# Altium PCB mada7.PcbDoc (part 3 of 3)
Units mil, origin at the board's own origin, x right, y up, seen from the top; angles counter-clockwise.
Board outline 3925 x 3925 mil, 2 copper layers (TopLayer, BottomLayer); 71 components, 72 nets, 888 pads, 9 vias.
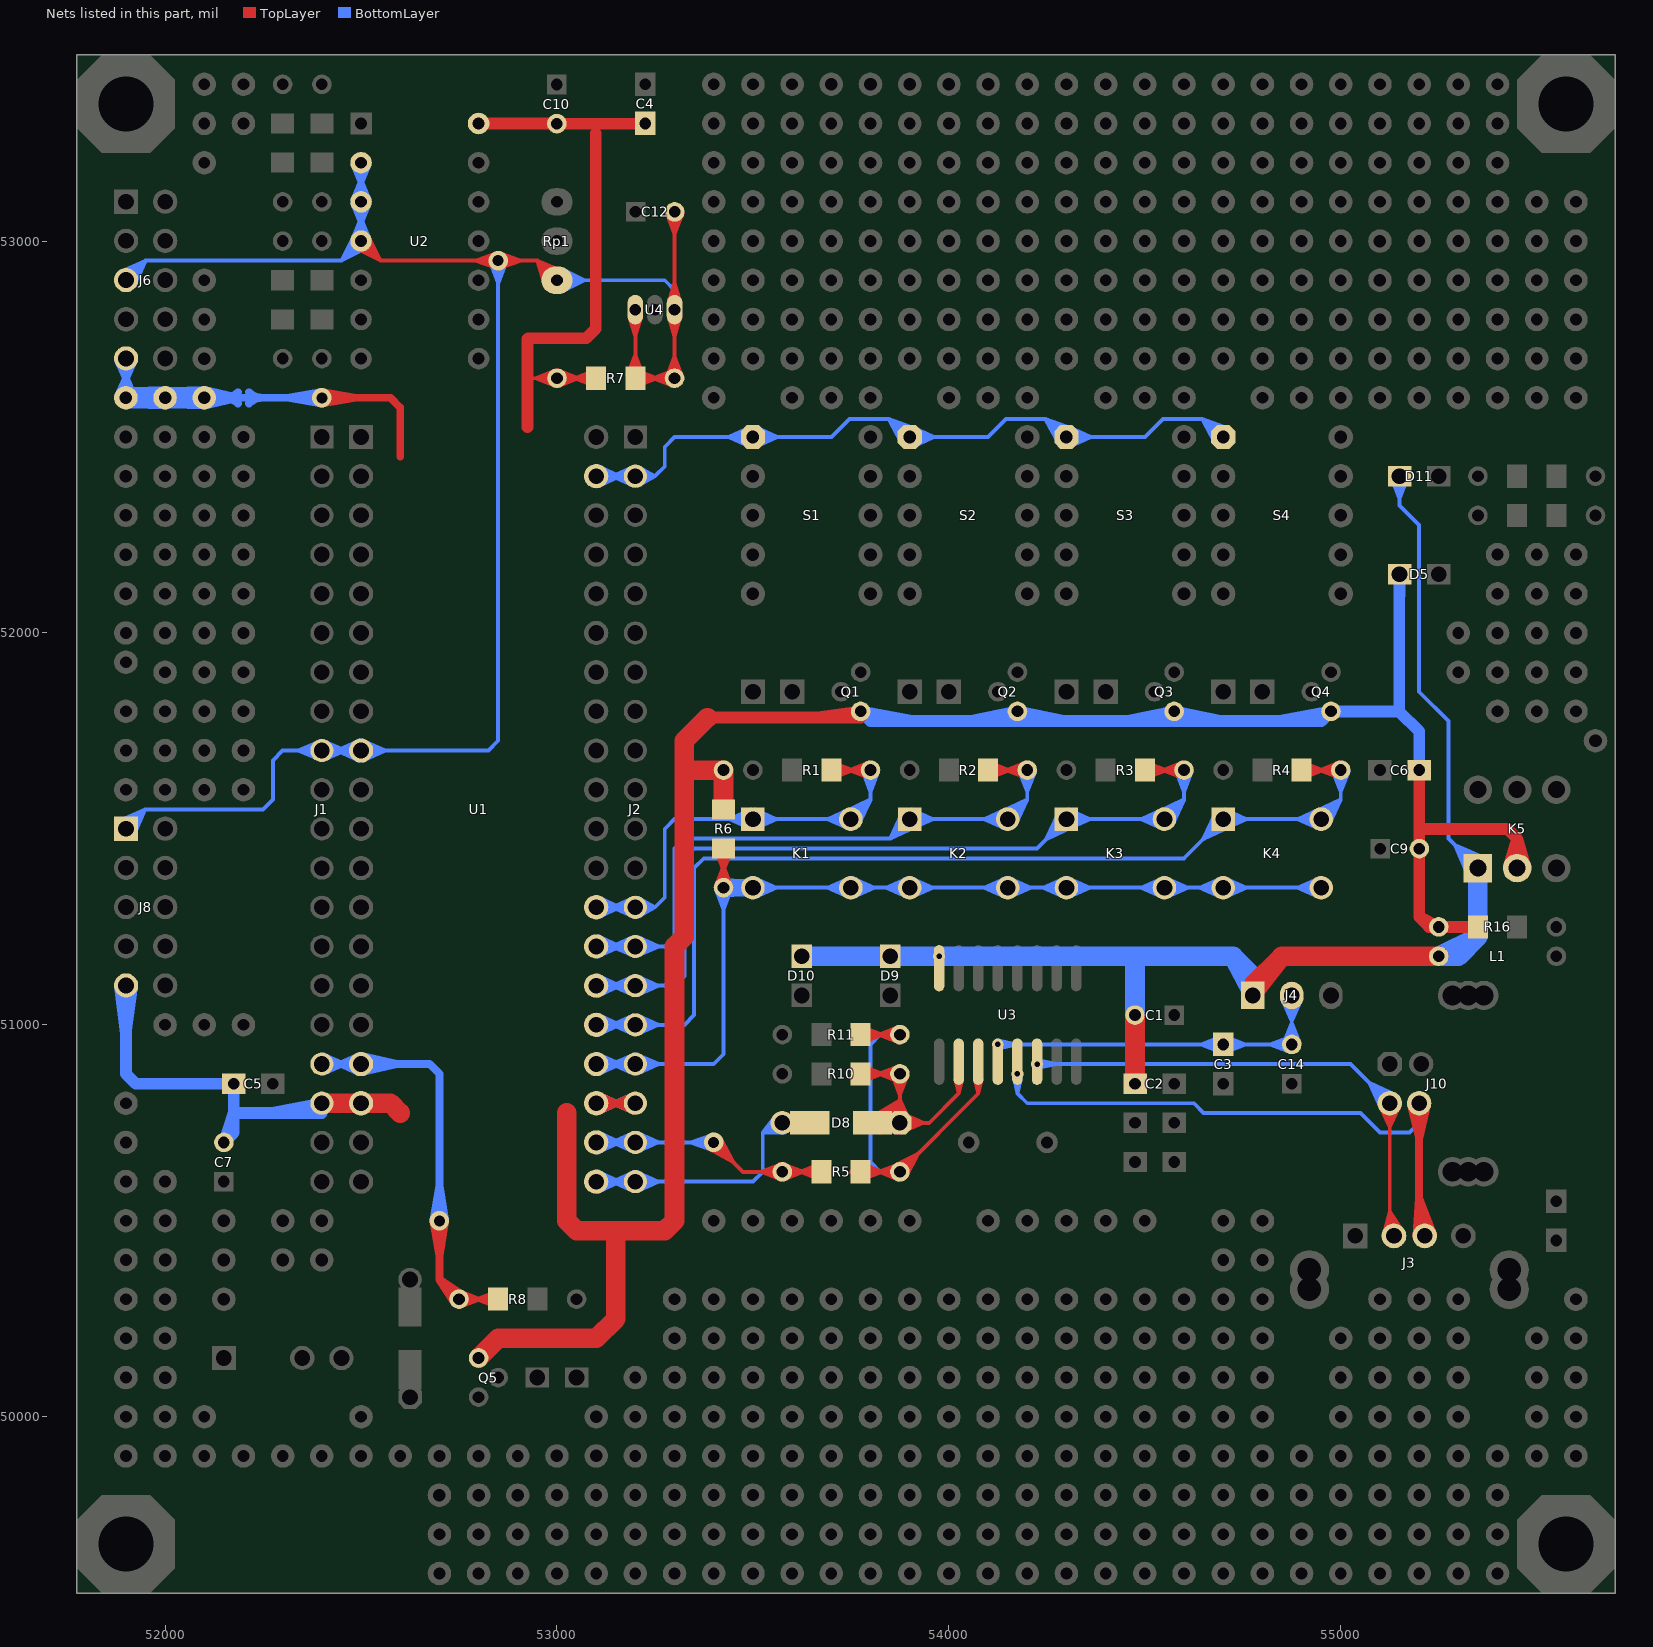
[diagram p3: the nets of this part, all layers, seen from the top]

## Via types
v1: diameter 30, hole 14, TopLayer to BottomLayer, 5 vias
v2: diameter 50, hole 28, TopLayer to BottomLayer, 4 vias

## Nets (pads, with @x,y where several pads share a name; then routed paths per layer and width w, separated by ;. In a path a pad name is that pad's centre, name@x,y a point inside that pad or via, vN(x,y) a via of type N, cw(c..) or ccw(c..) an arc to the next point about the centre after c; other vN are vias at no path point) (continued)
P27: J2.2 S1.1 S2.1 S3.1 S4.1 U1.39 | length 5542.1
  BottomLayer w10: U1.39@53100,52400 J2.2@53200,52400 53250,52400 ; U1.39@53100.3,52394.01 53161,52400 ; U1.39@53100.3,52405.99 53161,52400 ; U1.39@53102.1,52384.14 53161,52400 ; U1.39@53102.1,52415.86 53161,52400 ; U1.39@53105.54,52374.6 53161,52400 ; U1.39@53105.54,52425.4 53161,52400 ; J2.2@53194.95,52376 53140.47,52400 ; J2.2@53194.95,52424 53140.47,52400 ; J2.2@53198.23,52385.58 53140.47,52400 ; J2.2@53198.23,52414.42 53140.47,52400 ; J2.2@53202.11,52385.63 53250,52400 ; J2.2@53202.11,52414.37 53250,52400 ; J2.2@53206.02,52376.22 53250,52400 ; J2.2@53206.02,52423.78 53250,52400 ; S1.1@53494.46,52474.6 53439,52500 ; S1.1@53494.46,52525.4 53439,52500 ; S1.1@53497.9,52484.14 53439,52500 ; S1.1@53497.9,52515.86 53439,52500 ; S1.1@53499.7,52494.01 53439,52500 ; S1.1@53499.7,52505.99 53439,52500 ; S1.1@53500.3,52494.01 53561,52500 ; S1.1@53500.3,52505.99 53561,52500 ; S1.1@53502.1,52484.14 53561,52500 ; S1.1@53502.1,52515.86 53561,52500 ; S1.1@53505.54,52474.6 53561,52500 ; S1.1@53505.54,52525.4 53561,52500 ; S2.1@53879.8,52483.63 53846.02,52545.98 ; S2.1@53888.32,52489.07 53846.02,52545.98 ; S2.1@53895.92,52495.6 53846.02,52545.98 ; S2.1@53900.3,52494.01 53961,52500 ; S2.1@53900.3,52505.99 53961,52500 ; S2.1@53902.1,52484.14 53961,52500 ; S2.1@53902.1,52515.86 53961,52500 ; S2.1@53903.69,52504.73 53846.02,52545.98 ; S2.1@53905.54,52474.6 53961,52500 ; S2.1@53905.54,52525.4 53961,52500 ; S2.1@53908.93,52513.27 53846.02,52545.98 ; S2.1@53912.94,52522.55 53846.02,52545.98 ; S3.1@54279.8,52483.63 54246.02,52545.98 ; S3.1@54288.32,52489.07 54246.02,52545.98 ; S3.1@54295.92,52495.6 54246.02,52545.98 ; S3.1@54300.3,52494.01 54361,52500 ; S3.1@54300.3,52505.99 54361,52500 ; S3.1@54302.1,52484.14 54361,52500 ; S3.1@54302.1,52515.86 54361,52500 ; S3.1@54303.69,52504.73 54246.02,52545.98 ; S3.1@54305.54,52474.6 54361,52500 ; S3.1@54305.54,52525.4 54361,52500 ; S3.1@54308.93,52513.27 54246.02,52545.98 ; S3.1@54312.94,52522.55 54246.02,52545.98 ; S4.1@54679.8,52483.63 54646.02,52545.98 ; S4.1@54688.32,52489.07 54646.02,52545.98 ; S4.1@54695.92,52495.6 54646.02,52545.98 ; S4.1@54703.69,52504.73 54646.02,52545.98 ; S4.1@54708.93,52513.27 54646.02,52545.98 ; S4.1@54712.94,52522.55 54646.02,52545.98 ; 53250,52400 53275,52425 53275,52475 53300,52500 S1.1@53500,52500 53700,52500 53746,52546 53750,52546 53846,52546 ; 53846.02,52545.98 S2.1@53900,52500 ; 53846,52546 53892,52500 S2.1@53900,52500 ; S2.1@53900,52500 54100,52500 54146,52546 54150,52546 54246,52546 ; 54246.02,52545.98 S3.1@54300,52500 ; 54246,52546 54292,52500 S3.1@54300,52500 ; S3.1@54300,52500 54500,52500 54546,52546 54550,52546 54646,52546 ; 54646.02,52545.98 S4.1@54700,52500 54692,52500 54646,52546
P32: J2.18 U1.23 | length 1408.2
  TopLayer w10: U1.23@53100,50800 J2.18@53200,50800 ; U1.23@53100.3,50794.01 53161,50800 ; U1.23@53100.3,50805.99 53161,50800 ; U1.23@53102.1,50784.14 53161,50800 ; U1.23@53102.1,50815.86 53161,50800 ; U1.23@53105.54,50774.6 53161,50800 ; U1.23@53105.54,50825.4 53161,50800 ; J2.18@53194.95,50776 53140.47,50800 ; J2.18@53194.95,50824 53140.47,50800 ; J2.18@53198.23,50785.58 53140.47,50800 ; J2.18@53198.23,50814.42 53140.47,50800
  BottomLayer w10: U1.23@53100,50800 J2.18@53200,50800 ; U1.23@53100.3,50794.01 53161,50800 ; U1.23@53100.3,50805.99 53161,50800 ; U1.23@53102.1,50784.14 53161,50800 ; U1.23@53102.1,50815.86 53161,50800 ; U1.23@53105.54,50774.6 53161,50800 ; U1.23@53105.54,50825.4 53161,50800 ; J2.18@53194.95,50776 53140.47,50800 ; J2.18@53194.95,50824 53140.47,50800 ; J2.18@53198.23,50785.58 53140.47,50800 ; J2.18@53198.23,50814.42 53140.47,50800
P33: J2.17 K1.2 K1.3 K2.2 K2.3 K3.2 K3.3 K4.2 K4.3 R6.1 R6.3 U1.24 | length 8841.9
  TopLayer w10: R6.3@53404.77,51446.19 53425,51394.41 ; R6.1@53405.33,51353.64 53425,51405 ; R6.3@53414.46,51448.99 53425,51394.41 ; R6.1@53415.04,51350.91 53425,51405 ; R6.1@53425,51350 R6.3@53425,51450 ; R6.1@53434.96,51350.91 53425,51405 ; R6.3@53435.54,51448.99 53425,51394.41 ; R6.1@53444.67,51353.64 53425,51405 ; R6.3@53445.23,51446.19 53425,51394.41
  BottomLayer w10: U1.24@53100,50900 J2.17@53200,50900 53400,50900 53425,50925 R6.1@53425,51350 ; U1.24@53100.3,50894.01 53161,50900 ; U1.24@53100.3,50905.99 53161,50900 ; U1.24@53102.1,50884.14 53161,50900 ; U1.24@53102.1,50915.86 53161,50900 ; U1.24@53105.54,50874.6 53161,50900 ; U1.24@53105.54,50925.4 53161,50900 ; J2.17@53194.95,50876 53140.47,50900 ; J2.17@53194.95,50924 53140.47,50900 ; J2.17@53198.23,50885.58 53140.47,50900 ; J2.17@53198.23,50914.42 53140.47,50900 ; J2.17@53201.77,50885.58 53259.53,50900 ; J2.17@53201.77,50914.42 53259.53,50900 ; J2.17@53205.05,50876 53259.53,50900 ; J2.17@53205.05,50924 53259.53,50900 ; R6.1@53405.33,51346.36 53425,51295 ; R6.1@53415.04,51349.09 53425,51295 ; R6.1@53422.26,51330.19 K1.2@53479.54,51332.36 ; R6.1@53422.26,51369.81 K1.2@53479.54,51367.64 ; R6.1@53422.76,51340.25 K1.2@53479.54,51332.36 ; R6.1@53422.76,51359.75 K1.2@53479.54,51367.64 ; R6.1@53424.06,51340.04 K1.2@53479.93,51339.78 ; R6.1@53424.06,51359.96 K1.2@53479.93,51360.22 ; R6.1@53424.92,51330 K1.2@53479.93,51339.78 ; R6.1@53424.92,51370 K1.2@53479.93,51360.22 ; R6.1@53425.91,51340.04 K1.2@53480,51350 ; R6.1@53425.91,51359.96 K1.2@53480,51350 ; R6.1@53427.7,51340.37 K1.2@53479.93,51360.22 ; R6.1@53427.7,51359.63 K1.2@53479.93,51339.78 ; R6.1@53428.64,51330.33 K1.2@53480,51350 ; R6.1@53428.64,51369.67 K1.2@53480,51350 ; R6.1@53428.9,51340.79 K1.2@53479.54,51367.64 ; R6.1@53428.9,51359.21 K1.2@53479.54,51332.36 ; R6.1@53432.12,51331.31 K1.2@53479.93,51360.22 ; R6.1@53432.12,51368.69 K1.2@53479.93,51339.78 ; R6.1@53434.38,51332.34 K1.2@53479.54,51367.64 ; R6.1@53434.38,51367.66 K1.2@53479.54,51332.36 ; R6.1@53434.96,51349.09 53425,51295 ; R6.1@53444.67,51346.36 53425,51295 ; K1.2@53494.79,51325.55 R6.1@53440,51350 ; K1.2@53494.79,51374.45 R6.1@53440,51350 ; K1.2@53498.12,51335.12 R6.1@53440,51350 ; K1.2@53498.12,51364.88 R6.1@53440,51350 ; K1.2@53501.88,51335.12 53560,51350 ; K1.2@53501.88,51364.88 53560,51350 ; K1.2@53505.21,51325.55 53560,51350 ; K1.2@53505.21,51374.45 53560,51350 ; K1.3@53744.79,51325.55 53690,51350 ; K1.3@53744.79,51374.45 53690,51350 ; K1.3@53748.12,51335.12 53690,51350 ; K1.3@53748.12,51364.88 53690,51350 ; K1.3@53751.88,51335.12 53810,51350 ; K1.3@53751.88,51364.88 53810,51350 ; K1.3@53755.21,51325.55 53810,51350 ; K1.3@53755.21,51374.45 53810,51350 ; K2.2@53894.79,51325.55 53840,51350 ; K2.2@53894.79,51374.45 53840,51350 ; K2.2@53898.12,51335.12 53840,51350 ; K2.2@53898.12,51364.88 53840,51350 ; K2.2@53901.88,51335.12 53960,51350 ; K2.2@53901.88,51364.88 53960,51350 ; K2.2@53905.21,51325.55 53960,51350 ; K2.2@53905.21,51374.45 53960,51350 ; K2.3@54144.79,51325.55 54090,51350 ; K2.3@54144.79,51374.45 54090,51350 ; K2.3@54148.12,51335.12 54090,51350 ; K2.3@54148.12,51364.88 54090,51350 ; K2.3@54151.88,51335.12 54210,51350 ; K2.3@54151.88,51364.88 54210,51350 ; K2.3@54155.21,51325.55 54210,51350 ; K2.3@54155.21,51374.45 54210,51350 ; K3.2@54294.79,51325.55 54240,51350 ; K3.2@54294.79,51374.45 54240,51350 ; K3.2@54298.12,51335.12 54240,51350 ; K3.2@54298.12,51364.88 54240,51350 ; K3.2@54301.88,51335.12 54360,51350 ; K3.2@54301.88,51364.88 54360,51350 ; K3.2@54305.21,51325.55 54360,51350 ; K3.2@54305.21,51374.45 54360,51350 ; K3.3@54544.79,51325.55 54490,51350 ; K3.3@54544.79,51374.45 54490,51350 ; K3.3@54548.12,51335.12 54490,51350 ; K3.3@54548.12,51364.88 54490,51350 ; K3.3@54551.88,51335.12 54610,51350 ; K3.3@54551.88,51364.88 54610,51350 ; K3.3@54555.21,51325.55 54610,51350 ; K3.3@54555.21,51374.45 54610,51350 ; K4.2@54694.79,51325.55 54640,51350 ; K4.2@54694.79,51374.45 54640,51350 ; K4.2@54698.12,51335.12 54640,51350 ; K4.2@54698.12,51364.88 54640,51350 ; K4.2@54701.88,51335.12 54760,51350 ; K4.2@54701.88,51364.88 54760,51350 ; K4.2@54705.21,51325.55 54760,51350 ; K4.2@54705.21,51374.45 54760,51350 ; K4.3@54944.79,51325.55 54890,51350 ; K4.3@54944.79,51374.45 54890,51350 ; K4.3@54948.12,51335.12 54890,51350 ; K4.3@54948.12,51364.88 54890,51350 ; K4.3@54950,51350 K4.2@54700,51350 K3.3@54550,51350 K3.2@54300,51350 K2.3@54150,51350 K2.2@53900,51350 K1.3@53750,51350 K1.2@53500,51350 R6.1@53425,51350 ; R6.1@53425,51350 K1.2@53479.93,51360.22 ; R6.1@53425,51350 K1.2@53479.54,51367.64 ; R6.1@53425,51350 K1.2@53479.93,51339.78 ; R6.1@53425,51350 K1.2@53479.54,51332.36
P34: J2.16 K4.1 K4.4 R4.1 R4.3 U1.25 | length 5090
  TopLayer w10: R4.3@54900,51650 R4.1@55000,51650 ; R4.3@54901.01,51639.46 54955.59,51650 ; R4.3@54901.01,51660.54 54955.59,51650 ; R4.3@54903.81,51629.77 54955.59,51650 ; R4.3@54903.81,51670.23 54955.59,51650 ; R4.1@54996.36,51630.33 54945,51650 ; R4.1@54996.36,51669.67 54945,51650 ; R4.1@54999.09,51640.04 54945,51650 ; R4.1@54999.09,51659.96 54945,51650
  BottomLayer w10: U1.25@53100,51000 J2.16@53200,51000 53325,51000 53350,51025 53350,51400 53375,51425 54600,51425 K4.1@54700,51525 K4.4@54950,51525 55000,51575 ; U1.25@53100.3,50994.01 53161,51000 ; U1.25@53100.3,51005.99 53161,51000 ; U1.25@53102.1,50984.14 53161,51000 ; U1.25@53102.1,51015.86 53161,51000 ; U1.25@53105.54,50974.6 53161,51000 ; U1.25@53105.54,51025.4 53161,51000 ; J2.16@53194.95,50976 53140.47,51000 ; J2.16@53194.95,51024 53140.47,51000 ; J2.16@53198.23,50985.58 53140.47,51000 ; J2.16@53198.23,51014.42 53140.47,51000 ; J2.16@53201.77,50985.58 53259.53,51000 ; J2.16@53201.77,51014.42 53259.53,51000 ; J2.16@53205.05,50976 53259.53,51000 ; J2.16@53205.05,51024 53259.53,51000 ; K4.1@54679.54,51539.36 54648.79,51473.79 ; K4.1@54688.35,51534.45 54648.79,51473.79 ; K4.1@54701.88,51510.12 54760,51525 ; K4.1@54701.88,51539.88 54760,51525 ; K4.1@54705.21,51500.55 54760,51525 ; K4.1@54705.21,51549.45 54760,51525 ; K4.1@54709.45,51513.35 54648.79,51473.79 ; K4.1@54714.36,51504.54 54648.79,51473.79 ; K4.4@54935.73,51545.52 55000,51575 ; K4.4@54940.58,51536.67 55000,51575 ; K4.4@54944.79,51500.55 54890,51525 ; K4.4@54944.79,51549.45 54890,51525 ; K4.4@54948.12,51510.12 54890,51525 ; K4.4@54948.12,51539.88 54890,51525 ; K4.4@54961.67,51515.58 55000,51575 ; K4.4@54970.52,51510.73 55000,51575 ; R4.1@54980.33,51646.36 55000,51595 ; R4.1@54990.04,51649.09 55000,51595 ; R4.1@55000,51650 55000,51575 ; R4.1@55009.96,51649.09 55000,51595 ; R4.1@55019.67,51646.36 55000,51595
P35: J2.15 K3.1 K3.4 R3.1 R3.3 U1.26 | length 4604.6
  TopLayer w10: R3.3@54500,51650 R3.1@54600,51650 ; R3.3@54501.01,51639.46 54555.59,51650 ; R3.3@54501.01,51660.54 54555.59,51650 ; R3.3@54503.81,51629.77 54555.59,51650 ; R3.3@54503.81,51670.23 54555.59,51650 ; R3.1@54596.36,51630.33 54545,51650 ; R3.1@54596.36,51669.67 54545,51650 ; R3.1@54599.09,51640.04 54545,51650 ; R3.1@54599.09,51659.96 54545,51650
  BottomLayer w10: U1.26@53100,51100 J2.15@53200,51100 53300,51100 53325,51125 53325,51425 53350,51450 54225,51450 K3.1@54300,51525 K3.4@54550,51525 54600,51575 ; U1.26@53100.3,51094.01 53161,51100 ; U1.26@53100.3,51105.99 53161,51100 ; U1.26@53102.1,51084.14 53161,51100 ; U1.26@53102.1,51115.86 53161,51100 ; U1.26@53105.54,51074.6 53161,51100 ; U1.26@53105.54,51125.4 53161,51100 ; J2.15@53194.95,51076 53140.47,51100 ; J2.15@53194.95,51124 53140.47,51100 ; J2.15@53198.23,51085.58 53140.47,51100 ; J2.15@53198.23,51114.42 53140.47,51100 ; J2.15@53201.77,51085.58 53259.53,51100 ; J2.15@53201.77,51114.42 53259.53,51100 ; J2.15@53205.05,51076 53259.53,51100 ; J2.15@53205.05,51124 53259.53,51100 ; K3.1@54279.54,51539.36 54248.79,51473.79 ; K3.1@54288.35,51534.45 54248.79,51473.79 ; K3.1@54301.88,51510.12 54360,51525 ; K3.1@54301.88,51539.88 54360,51525 ; K3.1@54305.21,51500.55 54360,51525 ; K3.1@54305.21,51549.45 54360,51525 ; K3.1@54309.45,51513.35 54248.79,51473.79 ; K3.1@54314.36,51504.54 54248.79,51473.79 ; K3.4@54535.73,51545.52 54600,51575 ; K3.4@54540.58,51536.67 54600,51575 ; K3.4@54544.79,51500.55 54490,51525 ; K3.4@54544.79,51549.45 54490,51525 ; K3.4@54548.12,51510.12 54490,51525 ; K3.4@54548.12,51539.88 54490,51525 ; K3.4@54561.67,51515.58 54600,51575 ; K3.4@54570.52,51510.73 54600,51575 ; R3.1@54580.33,51646.36 54600,51595 ; R3.1@54590.04,51649.09 54600,51595 ; R3.1@54600,51650 54600,51575 ; R3.1@54609.96,51649.09 54600,51595 ; R3.1@54619.67,51646.36 54600,51595
P36: J2.14 K2.1 K2.4 R2.1 R2.3 U1.27 | length 4112.4
  TopLayer w10: R2.3@54100,51650 R2.1@54200,51650 ; R2.3@54101.01,51639.46 54155.59,51650 ; R2.3@54101.01,51660.54 54155.59,51650 ; R2.3@54103.81,51629.77 54155.59,51650 ; R2.3@54103.81,51670.23 54155.59,51650 ; R2.1@54196.36,51630.33 54145,51650 ; R2.1@54196.36,51669.67 54145,51650 ; R2.1@54199.09,51640.04 54145,51650 ; R2.1@54199.09,51659.96 54145,51650
  BottomLayer w10: U1.27@53100,51200 J2.14@53200,51200 53275,51200 53300,51225 53300,51450 53325,51475 53850,51475 ; U1.27@53100.3,51194.01 53161,51200 ; U1.27@53100.3,51205.99 53161,51200 ; U1.27@53102.1,51184.14 53161,51200 ; U1.27@53102.1,51215.86 53161,51200 ; U1.27@53105.54,51174.6 53161,51200 ; U1.27@53105.54,51225.4 53161,51200 ; J2.14@53194.95,51176 53140.47,51200 ; J2.14@53194.95,51224 53140.47,51200 ; J2.14@53198.23,51185.58 53140.47,51200 ; J2.14@53198.23,51214.42 53140.47,51200 ; J2.14@53201.77,51185.58 53259.53,51200 ; J2.14@53201.77,51214.42 53259.53,51200 ; J2.14@53205.05,51176 53259.53,51200 ; J2.14@53205.05,51224 53259.53,51200 ; K2.1@53879.48,51539.27 53850,51475 ; K2.1@53888.33,51534.42 53850,51475 ; K2.1@53901.88,51510.12 53960,51525 ; K2.1@53901.88,51539.88 53960,51525 ; K2.1@53905.21,51500.55 53960,51525 ; K2.1@53905.21,51549.45 53960,51525 ; K2.1@53909.42,51513.33 53850,51475 ; K2.1@53914.27,51504.48 53850,51475 ; K2.4@54135.73,51545.52 54200,51575 ; K2.4@54140.58,51536.67 54200,51575 ; K2.4@54144.79,51500.55 54090,51525 ; K2.4@54144.79,51549.45 54090,51525 ; K2.4@54148.12,51510.12 54090,51525 ; K2.4@54148.12,51539.88 54090,51525 ; K2.4@54161.67,51515.58 54200,51575 ; K2.4@54170.52,51510.73 54200,51575 ; R2.1@54180.33,51646.36 54200,51595 ; R2.1@54190.04,51649.09 54200,51595 ; R2.1@54200,51650 54200,51575 ; R2.1@54209.96,51649.09 54200,51595 ; R2.1@54219.67,51646.36 54200,51595 ; 53850,51475 K2.1@53900,51525 K2.4@54150,51525 54200,51575
P37: J2.13 K1.1 K1.4 R1.1 R1.3 U1.28 | length 3810.7
  TopLayer w10: R1.3@53701.01,51639.46 53755.59,51650 ; R1.3@53701.01,51660.54 53755.59,51650 ; R1.3@53701.12,51639.47 53750,51650 ; R1.3@53701.12,51660.53 53750,51650 ; R1.3@53703.81,51629.77 53755.59,51650 ; R1.3@53703.81,51670.23 53755.59,51650 ; R1.3@53704.24,51629.85 53750,51650 ; R1.3@53704.24,51670.15 53750,51650 ; R1.1@53796.36,51630.33 53745,51650 ; R1.1@53796.36,51669.67 53745,51650 ; R1.1@53799.09,51640.04 53745,51650 ; R1.1@53799.09,51659.96 53745,51650 ; R1.1@53800,51650 R1.3@53700,51650 53750,51650
  BottomLayer w10: U1.28@53100,51300 J2.13@53200,51300 53250,51300 ; U1.28@53100.3,51294.01 53161,51300 ; U1.28@53100.3,51305.99 53161,51300 ; U1.28@53102.1,51284.14 53161,51300 ; U1.28@53102.1,51315.86 53161,51300 ; U1.28@53105.54,51274.6 53161,51300 ; U1.28@53105.54,51325.4 53161,51300 ; J2.13@53194.95,51276 53140.47,51300 ; J2.13@53194.95,51324 53140.47,51300 ; J2.13@53198.23,51285.58 53140.47,51300 ; J2.13@53198.23,51314.42 53140.47,51300 ; J2.13@53202.11,51285.63 53250,51300 ; J2.13@53202.11,51314.37 53250,51300 ; J2.13@53206.02,51276.22 53250,51300 ; J2.13@53206.02,51323.78 53250,51300 ; K1.1@53494.79,51500.55 53440,51525 ; K1.1@53494.79,51549.45 53440,51525 ; K1.1@53498.12,51510.12 53440,51525 ; K1.1@53498.12,51539.88 53440,51525 ; K1.1@53501.88,51510.12 53560,51525 ; K1.1@53501.88,51539.88 53560,51525 ; K1.1@53505.21,51500.55 53560,51525 ; K1.1@53505.21,51549.45 53560,51525 ; K1.4@53735.73,51545.52 53800,51575 ; K1.4@53740.58,51536.67 53800,51575 ; K1.4@53744.79,51500.55 53690,51525 ; K1.4@53744.79,51549.45 53690,51525 ; K1.4@53748.12,51510.12 53690,51525 ; K1.4@53748.12,51539.88 53690,51525 ; K1.4@53761.67,51515.58 53800,51575 ; K1.4@53770.52,51510.73 53800,51575 ; R1.1@53780.33,51646.36 53800,51595 ; R1.1@53790.04,51649.09 53800,51595 ; R1.1@53800,51650 53800,51575 ; R1.1@53809.96,51649.09 53800,51595 ; R1.1@53819.67,51646.36 53800,51595 ; 53250,51300 53275,51325 53275,51500 53300,51525 K1.1@53500,51525 K1.4@53750,51525 53800,51575
P54: J1.17 R8.2 R8.4 U1.17 | length 2732
  TopLayer w10: R8.2@52750,50300 R8.4@52850,50300 ; R8.2@52750.91,50290.04 52805,50300 ; R8.2@52750.91,50309.96 52805,50300 ; R8.2@52753.64,50280.33 52805,50300 ; R8.2@52753.64,50319.67 52805,50300 ; R8.4@52846.19,50279.77 52794.41,50300 ; R8.4@52846.19,50320.23 52794.41,50300 ; R8.4@52848.99,50289.46 52794.41,50300 ; R8.4@52848.99,50310.54 52794.41,50300
  TopLayer w20: v2@52685.05,50498.74 52700,50411 v2@52714.95,50498.74 ; v2(52700,50500) 52700,50350 ; R8.2@52738.33,50290.58 52700,50350 ; R8.2@52750,50300 52700,50350 ; R8.2@52759.42,50311.67 52700,50350
  BottomLayer w10: J1.17@52400,50900 U1.17@52500,50900 ; J1.17@52401.77,50885.58 52459.53,50900 ; J1.17@52401.77,50914.42 52459.53,50900 ; J1.17@52405.05,50876 52459.53,50900 ; J1.17@52405.05,50924 52459.53,50900 ; U1.17@52494.46,50874.6 52439,50900 ; U1.17@52494.46,50925.4 52439,50900 ; U1.17@52497.9,50884.14 52439,50900 ; U1.17@52497.9,50915.86 52439,50900 ; U1.17@52499.7,50894.01 52439,50900 ; U1.17@52499.7,50905.99 52439,50900
  BottomLayer w20: U1.17@52500,50900 52675,50900 52700,50875 v2(52700,50500) ; U1.17@52502.42,50879.14 52591,50900 U1.17@52502.42,50920.86 ; v2@52685.05,50501.26 52700,50589 v2@52714.95,50501.26
RX: D8.1 D8.3 R10.1 R10.3 U3.2 | length 4036.7
  TopLayer w10: R10.3@53775,50875 R10.1@53875,50875 ; R10.3@53776.01,50864.46 53830.59,50875 ; R10.3@53776.01,50885.54 53830.59,50875 ; R10.3@53778.81,50854.77 53830.59,50875 ; R10.3@53778.81,50895.23 53830.59,50875 ; D8.3@53809.6,50768.7 53873.67,50807.02 ; D8.3@53815.34,50760.41 53873.67,50807.02 ; D8.3@53819.17,50726.3 D8.1@53868.75,50725.79 ; D8.3@53819.17,50773.7 D8.1@53868.75,50774.21 ; D8.3@53820.31,50736.42 D8.1@53868.75,50725.79 ; D8.3@53820.31,50763.58 D8.1@53868.75,50774.21 ; D8.3@53823.2,50735.65 D8.1@53872.75,50735.17 ; D8.3@53823.2,50764.35 D8.1@53872.75,50764.83 ; D8.3@53824.15,50725.51 D8.1@53872.75,50735.17 ; D8.3@53824.15,50774.49 D8.1@53872.75,50764.83 ; D8.3@53827.25,50735.58 D8.1@53885,50750 ; D8.3@53827.25,50764.42 D8.1@53885,50750 ; D8.3@53827.6,50735.63 D8.1@53875,50750 ; D8.3@53827.6,50764.37 D8.1@53875,50750 ; D8.3@53830.53,50726 D8.1@53885,50750 ; D8.3@53830.53,50774 D8.1@53885,50750 ; D8.3@53831.55,50726.24 D8.1@53875,50750 ; D8.3@53831.55,50773.76 D8.1@53875,50750 ; D8.3@53831.81,50736.93 D8.1@53872.75,50764.83 ; D8.3@53831.81,50763.07 D8.1@53872.75,50735.17 ; D8.3@53834.34,50738.5 D8.1@53868.75,50774.21 ; D8.3@53834.34,50761.5 D8.1@53868.75,50725.79 ; D8.3@53837.43,50741.75 53873.67,50807.02 ; D8.3@53838.38,50729.14 D8.1@53872.75,50764.83 ; D8.3@53838.38,50770.86 D8.1@53872.75,50735.17 ; D8.3@53842.37,50732.22 D8.1@53868.75,50774.21 ; D8.3@53842.37,50767.78 D8.1@53868.75,50725.79 ; D8.1@53846.55,50737.46 53873.67,50807.02 ; D8.1@53850.55,50755.21 53875,50810 ; R10.1@53855.33,50871.36 53875,50820 ; D8.1@53860.12,50751.88 53875,50810 ; R10.1@53865.04,50874.09 53875,50820 ; R10.1@53871.36,50855.33 53820,50875 ; R10.1@53871.36,50894.67 53820,50875 ; R10.1@53874.09,50865.04 53820,50875 ; R10.1@53874.09,50884.96 53820,50875 ; D8.1@53876.88,50735.12 53935,50750 ; D8.1@53876.88,50764.88 53935,50750 ; D8.1@53880.21,50725.55 53935,50750 ; D8.1@53880.21,50774.45 53935,50750 ; R10.1@53884.96,50874.09 53875,50820 ; D8.1@53889.88,50751.88 53875,50810 ; R10.1@53894.67,50871.36 53875,50820 ; D8.1@53899.45,50755.21 53875,50810 ; U3.2@54016.56,50859.48 54025,50825 ; U3.2@54025,50860.5 54025,50825 ; U3.2@54025,50870.19 U3.2@54025,50906 54025,50825 ; U3.2@54033.44,50859.48 54025,50825 ; D8.3@53825,50750 D8.1@53875,50750 ; D8.3@53825,50750 D8.1@53872.75,50764.83 ; D8.3@53825,50750 D8.1@53872.75,50735.17 ; D8.3@53825,50750 D8.1@53868.75,50774.21 ; D8.3@53825,50750 D8.1@53868.75,50725.79 ; D8.3@53825,50750 53950,50750 54025,50825 ; D8.3@53825.47,50750 D8.1@53875,50750 ; D8.3@53825.47,50750 D8.1@53872.75,50764.83 ; D8.3@53825.47,50750 D8.1@53872.75,50735.17 ; D8.3@53825.47,50750 D8.1@53868.75,50774.21 ; D8.3@53825.47,50750 D8.1@53868.75,50725.79 ; D8.3@53825.47,50750 D8.1@53885,50750 ; D8.3@53825.47,50750 53873.67,50807.02 ; D8.1@53875,50750 R10.1@53875,50875 ; 53875,50820 R10.1@53875,50875
RXD: D8.2 D8.4 J2.20 U1.21 | length 1717.4
  BottomLayer w10: U1.21@53100,50600 J2.20@53200,50600 53275,50600 53500,50600 53525,50625 53525,50725 ; U1.21@53100.3,50594.01 53161,50600 ; U1.21@53100.3,50605.99 53161,50600 ; U1.21@53102.1,50584.14 53161,50600 ; U1.21@53102.1,50615.86 53161,50600 ; U1.21@53105.54,50574.6 53161,50600 ; U1.21@53105.54,50625.4 53161,50600 ; J2.20@53194.95,50576 53140.47,50600 ; J2.20@53194.95,50624 53140.47,50600 ; J2.20@53198.23,50585.58 53140.47,50600 ; J2.20@53198.23,50614.42 53140.47,50600 ; J2.20@53201.77,50585.58 53259.53,50600 ; J2.20@53201.77,50614.42 53259.53,50600 ; J2.20@53205.05,50576 53259.53,50600 ; J2.20@53205.05,50624 53259.53,50600 ; D8.2@53559.1,50769.29 53525,50725 ; D8.2@53566.55,50762.4 53525,50725 ; D8.2@53579.85,50735.8 53525,50725 ; D8.2@53580.9,50725.71 53525,50725 ; 53525,50725 D8.2@53575,50750 53550,50750 53525,50725
TX: R5.1 R5.3 R11.1 R11.3 U3.3 | length 2883.6
  TopLayer w10: R5.3@53750,50625 R5.1@53850,50625 ; R5.3@53775,50625 53830.59,50625 ; R11.3@53775,50975 R11.1@53875,50975 ; R5.3@53776.01,50614.46 53830.59,50625 ; R5.3@53776.01,50635.54 53830.59,50625 ; R11.3@53776.01,50964.46 53830.59,50975 ; R11.3@53776.01,50985.54 53830.59,50975 ; R5.3@53778.81,50604.77 53830.59,50625 ; R5.3@53778.81,50645.23 53830.59,50625 ; R11.3@53778.81,50954.77 53830.59,50975 ; R11.3@53778.81,50995.23 53830.59,50975 ; R5.1@53863.19,50641.14 53921.21,50671.21 ; R5.1@53868.49,50632.59 53921.21,50671.21 ; R5.1@53871.36,50605.33 53820,50625 ; R5.1@53871.36,50644.67 53820,50625 ; R11.1@53871.36,50955.33 53820,50975 ; R11.1@53871.36,50994.67 53820,50975 ; R5.1@53874.09,50615.04 53820,50625 ; R5.1@53874.09,50634.96 53820,50625 ; R11.1@53874.09,50965.04 53820,50975 ; R11.1@53874.09,50984.96 53820,50975 ; R5.1@53882.59,50618.49 53921.21,50671.21 ; R5.1@53891.14,50613.19 53921.21,50671.21 ; U3.3@54066.56,50859.48 54075,50825 ; U3.3@54075,50860.5 54075,50825 ; U3.3@54075,50870.19 U3.3@54075,50906 54075,50825 ; U3.3@54083.44,50859.48 54075,50825 ; 53820,50625 R5.1@53875,50625 54075,50825
  BottomLayer w10: R5.1@53871,50605.4 53825,50625 ; R5.1@53871,50644.6 53825,50625 ; R11.1@53871,50955.4 53825,50975 ; R11.1@53871,50994.6 53825,50975 ; R5.1@53874,50615.05 53825,50625 ; R5.1@53874,50634.95 53825,50625 ; R11.1@53874,50965.05 53825,50975 ; R11.1@53874,50984.95 53825,50975 ; R5.1@53875,50625 53825,50625 ; 53825,50625 53800,50650 53800,50925 53800,50950 53825,50975 ; 53825,50975 R11.1@53875,50975 53850,50975 53825,50975
TXD: J2.19 R5.2 R5.4 U1.22 | length 2630.7
  TopLayer w10: v2@53387.99,50684.01 53450.21,50649.79 ; v2@53393.44,50692.45 53450.21,50649.79 ; v2(53400,50700) 53475,50625 R5.2@53575,50625 R5.4@53675,50625 ; v2@53407.55,50706.56 53450.21,50649.79 ; v2@53415.99,50712.01 53450.21,50649.79 ; R5.2@53571.36,50605.33 53520,50625 ; R5.2@53571.36,50644.67 53520,50625 ; R5.2@53574.09,50615.04 53520,50625 ; R5.2@53574.09,50634.96 53520,50625 ; R5.2@53575.91,50615.04 53630,50625 ; R5.2@53575.91,50634.96 53630,50625 ; R5.2@53578.64,50605.33 53630,50625 ; R5.2@53578.64,50644.67 53630,50625 ; R5.4@53671.19,50604.77 53619.41,50625 ; R5.4@53671.19,50645.23 53619.41,50625 ; R5.4@53673.99,50614.46 53619.41,50625 ; R5.4@53673.99,50635.54 53619.41,50625
  BottomLayer w10: U1.22@53100,50700 J2.19@53200,50700 v2(53400,50700) ; U1.22@53100.3,50694.01 53161,50700 ; U1.22@53100.3,50705.99 53161,50700 ; U1.22@53102.1,50684.14 53161,50700 ; U1.22@53102.1,50715.86 53161,50700 ; U1.22@53105.54,50674.6 53161,50700 ; U1.22@53105.54,50725.4 53161,50700 ; J2.19@53194.95,50676 53140.47,50700 ; J2.19@53194.95,50724 53140.47,50700 ; J2.19@53198.23,50685.58 53140.47,50700 ; J2.19@53198.23,50714.42 53140.47,50700 ; J2.19@53201.77,50685.58 53259.53,50700 ; J2.19@53201.77,50714.42 53259.53,50700 ; J2.19@53205.05,50676 53259.53,50700 ; J2.19@53205.05,50724 53259.53,50700 ; v2@53396.61,50680.29 53341,50700 ; v2@53396.61,50719.71 53341,50700 ; v2@53399.15,50690.04 53341,50700 ; v2@53399.15,50709.96 53341,50700
UD+: J3.3 J10.3 U3.5 | length 2396.3
  TopLayer w20: J10.3@55179.14,50797.58 55200,50709 J10.3@55220.86,50797.58 ; J3.3@55192.89,50460.6 55200,50556.65 ; J3.3@55200,50472.05 J10.3@55200,50800 ; J3.3@55214.37,50461.42 55200,50556.65 ; J3.3@55235.13,50466.98 55200,50556.65
  BottomLayer w10: v1@54165.05,50873.98 54175,50826 v1@54184.95,50873.98 ; v1(54175,50875) 54175,50825 54200,50800 54625,50800 54650,50775 ; 54634,50791 54650,50775 ; J10.3@55174.89,50793.24 55200,50750 ; J10.3@55184.21,50797.44 55200,50750 ; J10.3@55194.01,50799.64 55200,50750 ; J10.3@55200,50800 55200,50750 ; J10.3@55205.99,50799.64 55200,50750 ; J10.3@55215.79,50797.44 55200,50750 ; J10.3@55225.11,50793.24 55200,50750 ; 54650,50775 55050,50775 55100,50725 55175,50725 55200,50750
UD-: J3.2 J10.2 U3.6 | length 2738.1
  TopLayer w10: J10.2@55099.6,50794.46 55125,50739 ; J3.2@55109.16,50462.54 55125,50523.6 ; J10.2@55109.14,50797.9 55125,50739 ; J10.2@55119.01,50799.7 55125,50739 ; J3.2@55119.15,50460.79 55125,50523.6 ; J3.2@55125,50450 55125,50575 ; 55125,50550.79 55125,50575 ; J10.2@55125,50800 55125,50575 ; J3.2@55129.18,50460.65 55125,50523.6 ; J10.2@55130.99,50799.7 55125,50739 ; J3.2@55135.63,50461.42 55125,50523.6 ; J10.2@55140.86,50797.9 55125,50739 ; J3.2@55141.97,50462.84 55125,50523.6 ; J10.2@55150.4,50794.46 55125,50739 ; J3.2@55151.39,50466.3 55125,50523.6 ; J3.2@55160.23,50471.27 55125,50523.6
  BottomLayer w10: v1(54225,50900) 55025,50900 J10.2@55125,50800 55072.79,50852.21 ; v1@54226.02,50890.05 54274,50900 v1@54226.02,50909.95 ; J10.2@55103.67,50785.14 55072.79,50852.21 ; J10.2@55112.53,50789.98 55072.79,50852.21 ; J10.2@55120.59,50795.93 55072.79,50852.21 ; J10.2@55129.07,50804.41 55072.79,50852.21 ; J10.2@55135.02,50812.47 55072.79,50852.21 ; J10.2@55139.86,50821.33 55072.79,50852.21
V33: C3.1 C14.2 J4.2 U3.4 | length 2298
  BottomLayer w10: v1(54125,50950) 54725,50950 C14.2@54875,50950 J4.2@54875,51075 J4.2@54875,51100 ; v1@54126.02,50940.05 54174,50950 v1@54126.02,50959.95 ; C3.1@54696.06,50929.37 54644,50950 ; C3.1@54696.06,50970.63 54644,50950 ; C3.1@54698.92,50939.05 54644,50950 ; C3.1@54698.92,50960.95 54644,50950 ; C3.1@54701.08,50939.05 54756,50950 ; C3.1@54701.08,50960.95 54756,50950 ; C3.1@54703.94,50929.37 54756,50950 ; C3.1@54703.94,50970.63 54756,50950 ; J4.2@54850.55,51064.79 54875,51010 ; C14.2@54855.33,50953.64 54875,51005 ; J4.2@54860.12,51068.12 54875,51010 ; C14.2@54865.04,50950.91 54875,51005 ; C14.2@54871.36,50930.33 54820,50950 ; C14.2@54871.36,50969.67 54820,50950 ; C14.2@54874.09,50940.04 54820,50950 ; C14.2@54874.09,50959.96 54820,50950 ; J4.2@54875,51070 54875,51010 ; C14.2@54884.96,50950.91 54875,51005 ; J4.2@54889.88,51068.12 54875,51010 ; C14.2@54894.67,50953.64 54875,51005 ; J4.2@54899.45,51064.79 54875,51010 ; 54644,50950 C3.1@54700,50950 54756,50950
VCC: C4.1 C5.1 C6.1 C7.2 C9.2 C10.2 D5.1 J1.18 J6.9 J8.9 K5.2 pad.16@52100,52600 pad.17@52000,52600 pad.18@51900,52600 Q1.1 Q2.1 Q3.1 Q4.1 Q5.1 R6.2 R6.4 R7.2 R7.4 R16.1 R16.3 U1.18 U2.14 | length 15665.2
  TopLayer w10: 52925,52650 R7.2@53000,52650 R7.4@53100,52650 ; R7.2@52996.36,52630.33 52945,52650 ; R7.2@52996.36,52669.67 52945,52650 ; R7.2@52999.09,52640.04 52945,52650 ; R7.2@52999.09,52659.96 52945,52650 ; R7.2@53000.91,52640.04 53055,52650 ; R7.2@53000.91,52659.96 53055,52650 ; R7.2@53003.64,52630.33 53055,52650 ; R7.2@53003.64,52669.67 53055,52650 ; R7.4@53096.19,52629.77 53044.41,52650 ; R7.4@53096.19,52670.23 53044.41,52650 ; R7.4@53098.99,52639.46 53044.41,52650 ; R7.4@53098.99,52660.54 53044.41,52650
  TopLayer w20: v2(52400,52600) 52575,52600 52600,52575 52600,52450 ; v2@52401.26,52585.05 52489,52600 v2@52401.26,52614.95
  TopLayer w30: U2.14@52800,53300 C10.2@53000,53300 ; 52884.54,53300 C10.2@52999.54,53299.5 C4.1@53225,53299.5 ; 52925,52525 52925,52650 52925,52750 52927,52752 53075,52752 53099,52776 53099,53275 ; 53109,53299.5 C4.1@53225,53300 ; 53400,51784 Q1.1@53775,51784 ; 53655.88,51784 Q1.1@53775,51800 ; C9.2@55200,51441.69 55200,51500 ; C6.1@55200,51650 55200,51500 ; R16.3@55350,51250 R16.1@55250,51250 ; K5.2@55428.8,51403.06 55450,51475 ; K5.2@55450,51400 55450,51475 ; K5.2@55471.2,51403.06 55450,51475 ; 55200,51500 C9.2@55200.5,51449.54 55200.5,51275.5 ; 55200,51500 55425,51500 55450,51475 ; 55200.5,51275.5 R16.1@55250,51250 ; 55200.5,51275.5 55225,51251 55225,51250 R16.1@55250,51250
  TopLayer w50: J1.18@52400,50800 U1.18@52500,50800 52575,50800 52600,50775 ; Q5.1@52800,50150 52850,50200 53100,50200 53150,50250 53150,50475 ; 53025,50775 53025,50500 53050,50475 53150,50475 ; 53384,51784 53325,51725 53325,51650 ; R6.4@53425,51550 R6.2@53425,51650 53325,51650 ; 53150,50475 53275,50475 53300,50500 53300,51200 53325,51225 53325,51650
  BottomLayer w20: J6.9@51879.75,52696.11 51900.29,52650.29 ; pad.18@51880.42,52604.09 51900.29,52650.29 ; J6.9@51900.29,52700.5 51900.29,52650.29 ; pad.18@51902.22,52580.12 pad.17@51990,52600 ; pad.18@51902.22,52619.88 pad.17@51990,52600 ; pad.18@51919.62,52603.87 51900.29,52650.29 ; J6.9@51920.82,52696.11 51900.29,52650.29 ; pad.17@51993.92,52580.95 pad.18@51911.09,52617.87 ; pad.17@51993.92,52619.05 pad.18@51911.09,52582.13 ; pad.17@51997.33,52580.18 pad.18@51925,52600 ; pad.17@51997.33,52619.82 pad.18@51925,52600 ; pad.17@51997.78,52580.12 pad.18@51910,52600 ; pad.17@51997.78,52619.88 pad.18@51910,52600 ; pad.17@52001.75,52580.08 pad.18@51911.09,52582.13 ; pad.17@52001.75,52619.92 pad.18@51911.09,52617.87 ; pad.17@52002.22,52580.12 52090,52600 pad.17@52002.22,52619.88 ; pad.16@52093.92,52580.95 pad.17@52011.09,52617.87 ; pad.16@52093.92,52619.05 pad.17@52011.09,52582.13 ; pad.16@52097.78,52580.12 52010,52600 pad.16@52097.78,52619.88 ; pad.16@52101.75,52580.08 pad.17@52011.09,52582.13 ; pad.16@52101.75,52619.92 pad.17@52011.09,52617.87 ; pad.16@52102.22,52580.12 52190,52600 pad.16@52102.22,52619.88 ; 52185.86,52585.86 ccw(c52151.72,52551.72) 52151.72,52600 ccw(c52151.72,52648.28) 52185.86,52614.14 ; 52214.14,52585.86 cw(c52248.28,52551.72) 52248.28,52600 cw(c52248.28,52648.28) 52214.14,52614.14 ; v2@52398.74,52585.05 52311,52600 v2@52398.74,52614.95 ; v2(52400,52600) 52200,52600 pad.16@52100,52600 ; 51900.29,52650.29 pad.18@51900,52600 pad.17@51990,52600 ; 51900.29,52650.29 51900.29,52624.71 pad.18@51925,52600 ; pad.18@51910,52600 pad.17@52000,52600 ; pad.18@51911.09,52582.13 pad.17@52000,52600 ; pad.18@51911.09,52617.87 pad.17@52000,52600 ; pad.18@51925,52600 pad.17@52000,52600 ; pad.17@52000,52600 pad.16@52100,52600 ; pad.17@52011.09,52582.13 pad.16@52100,52600 ; pad.17@52011.09,52617.87 pad.16@52100,52600
  BottomLayer w30: J8.9@51884.32,51099.48 51900,50979.5 ; J8.9@51916.25,51099.4 51900,50979.5 ; 52055,50850 C5.1@52171,50850 ; 52273.34,50775 J1.18@52400,50800 ; J1.18@52400,50775 52175,50775 ; 53913.44,51775 Q1.1@53775,51800 53800,51775 54175,51775 ; 54050.8,51775 Q2.1@54175,51800 ; 54299.27,51775 Q2.1@54175,51800 ; 54450.73,51775 Q3.1@54575,51800 54699.2,51775 ; 54836.56,51775 Q4.1@54975,51800 ; 55090,51799.5 Q4.1@54975,51800 ; 55149,51800.04 D5.1@55149,52150.69 ; 55149,52033.98 D5.1@55150,52150 ; 55149.04,51800 Q4.1@54975,51800 ; C6.1@55200,51650 55200,51749.04 55149.54,51799.5 54975.5,51799.5 Q4.1@54975,51800 ; 51900,50979.5 J8.9@51900.29,51100.5 51900,51100.21 51900,50875 51925,50850 52000,50850 C5.1@52175,50850 52175,50775 ; 52175,50775 C7.2@52150,50700 52175,50725 52175,50775 ; 54175,51775 54575,51775 54950,51775 Q4.1@54975,51800 ; 54175,51775 Q2.1@54175,51800
VCCU: C1.2 C2.1 D9.1 D10.1 D11.1 J4.1 K5.1 L1.2 U3.16 | length 4673.5
  TopLayer w50: C2.1@54475,50850 C1.2@54475,51025 ; J4.1@54775,51080 54850,51175 ; J4.1@54775,51100 54850,51175 ; L1.2@55250,51175 54850,51175
  BottomLayer w10: D11.1@55129.37,52396.06 55150,52344 ; D11.1@55139.05,52398.92 55150,52344 ; D11.1@55150,52400 55150,52325 55200,52275 55200,51850 55275,51775 55275,51475 K5.1@55350,51400 ; D11.1@55160.95,52398.92 55150,52344 ; D11.1@55170.63,52396.06 55150,52344 ; K5.1@55323.92,51382.48 55292.37,51457.63 ; K5.1@55333,51386.98 55292.37,51457.63 ; K5.1@55341.38,51392.51 55292.37,51457.63 ; K5.1@55357.49,51408.62 55292.37,51457.63 ; K5.1@55363.02,51417 55292.37,51457.63 ; K5.1@55367.52,51426.08 55292.37,51457.63
  BottomLayer w50: D10.1@53625,51175 D9.1@53850,51175 ; 53800,51175 D9.1@53850,51175 ; C1.2@54475,51025 54475,51175 ; J4.1@54775,51075 54775,51125 ; K5.1@55350,51400 55350,51225 ; D9.1@53850,51175 v1(53975,51175) 54475,51175 ; 54475,51175 54725,51175 ; 54725,51175 J4.1@54775,51080 ; 54725,51175 54775,51125 ; J4.1@54775,51080 54775,51125 ; J4.1@54775,51080 54775,51125 ; L1.2@55250,51175 55300,51175 ; L1.2@55250,51175 55350,51225 ; L1.2@55250,51175 55300,51175 ; 55300,51175 55350,51225
VREF: C12.2 J1.9 J6.5 J8.1 R7.1 R7.3 Rp1.1 U1.9 U2.2 U2.3 U2.4 U4.1 U4.3 | length 11757.9
  TopLayer w10: U2.4@52486.9,52981.71 52548.71,52951.29 ; U2.4@52492,52990.4 52548.71,52951.29 ; U2.4@52500,53000 52550,52950 v2(52850,52950) 52950,52950 ; U2.4@52509.6,53008 52548.71,52951.29 ; U2.4@52518.29,53013.1 52548.71,52951.29 ; v2@52846.61,52930.29 52791,52950 ; v2@52846.61,52969.71 52791,52950 ; v2@52849.15,52940.04 52791,52950 ; v2@52849.15,52959.96 52791,52950 ; v2@52850.85,52940.04 52909,52950 ; v2@52850.85,52959.96 52909,52950 ; v2@52853.39,52930.29 52909,52950 ; v2@52853.39,52969.71 52909,52950 ; Rp1.1@52968.79,52885.41 52950,52950 ; Rp1.1@52978.31,52888.98 52950,52950 ; Rp1.1@52987.09,52893.88 52950,52950 ; Rp1.1@52995,52900 52950,52950 ; Rp1.1@53000,52900 52950,52950 ; Rp1.1@53001.92,52907.22 52950,52950 ; Rp1.1@53007.71,52915.44 52950,52950 ; Rp1.1@53012.26,52924.54 52950,52950 ; R7.3@53179.77,52657.75 53200,52709.53 ; U4.1@53185.17,52805.25 53200,52757.5 ; R7.3@53189.46,52654.95 53200,52709.53 ; R7.3@53200,52653.94 53200,52709.53 ; U4.1@53200,52807.5 53200,52757.5 ; U4.1@53200,52825 R7.3@53200,52650 R7.1@53300,52650 53300,52725 ; R7.3@53201.01,52639.46 53255.59,52650 ; R7.3@53201.01,52660.54 53255.59,52650 ; R7.3@53203.81,52629.77 53255.59,52650 ; R7.3@53203.81,52670.23 53255.59,52650 ; R7.3@53210.54,52654.95 53200,52709.53 ; U4.1@53214.83,52805.25 53200,52757.5 ; R7.3@53220.23,52657.75 53200,52709.53 ; R7.1@53280.33,52653.64 53300,52705 ; C12.2@53280.8,53071.11 53300,53019.09 ; U4.3@53285.17,52805.25 53300,52757.5 ; U4.3@53285.17,52844.75 53300,52892.5 ; R7.1@53290.04,52650.91 53300,52705 ; C12.2@53290.53,53073.73 53300,53019.09 ; R7.1@53296.36,52630.33 53245,52650 ; R7.1@53296.36,52669.67 53245,52650 ; R7.1@53299.09,52640.04 53245,52650 ; R7.1@53299.09,52659.96 53245,52650 ; 53300,52700 53300,52725 ; U4.3@53300,52807.5 53300,52757.5 ; U4.3@53300,52842.5 53300,52892.5 ; 53300,53049.54 U4.3@53300,52825 53300,52725 ; C12.2@53300.5,53074.54 53300,53019.09 ; R7.1@53309.96,52650.91 53300,52705 ; C12.2@53310.45,53073.55 53300,53019.09 ; U4.3@53314.83,52805.25 53300,52757.5 ; U4.3@53314.83,52844.75 53300,52892.5 ; R7.1@53319.67,52653.64 53300,52705 ; C12.2@53320.14,53070.76 53300,53019.09
  BottomLayer w10: J8.1@51885.64,51521.98 51949.79,51550 ; J6.5@51885.67,52922 51950,52950 ; J8.1@51890.34,51513.03 51949.79,51550 ; J6.5@51890.36,52913.05 51950,52950 ; J8.1@51896.23,51504.92 51949.79,51550 ; J6.5@51896.24,52904.93 51950,52950 ; J8.1@51900.29,51500.5 51949.79,51550 ; J8.1@51904.71,51496.44 51949.79,51550 ; J6.5@51904.7,52896.43 51950,52950 ; J8.1@51912.82,51490.55 51949.79,51550 ; J6.5@51912.8,52890.52 51950,52950 ; J8.1@51921.77,51485.85 51949.79,51550 ; J6.5@51921.73,52885.79 51950,52950 ; J1.9@52394.95,51676 52340.47,51700 ; J1.9@52394.95,51724 52340.47,51700 ; J1.9@52398.23,51685.58 52340.47,51700 ; J1.9@52398.23,51714.42 52340.47,51700 ; J1.9@52401.77,51685.58 52459.53,51700 ; J1.9@52401.77,51714.42 52459.53,51700 ; J1.9@52405.05,51676 52459.53,51700 ; J1.9@52405.05,51724 52459.53,51700 ; U2.4@52477.93,53004.4 52500,53057.5 ; U2.3@52477.93,53095.6 52500,53042.5 ; U2.3@52477.93,53104.4 52500,53157.5 ; U2.2@52477.93,53195.6 52500,53142.5 ; U2.4@52481.71,53013.1 52451.29,52951.29 ; U2.4@52487.57,53001.36 52500,53057.5 ; U2.3@52487.57,53098.64 52500,53042.5 ; U2.3@52487.57,53101.36 52500,53157.5 ; U2.2@52487.57,53198.64 52500,53142.5 ; U2.4@52490.4,53008 52451.29,52951.29 ; U1.9@52494.46,51674.6 52439,51700 ; U1.9@52494.46,51725.4 52439,51700 ; U1.9@52497.9,51684.14 52439,51700 ; U1.9@52497.9,51715.86 52439,51700 ; U1.9@52499.7,51694.01 52439,51700 ; U1.9@52499.7,51705.99 52439,51700 ; U2.2@52500,53200 U2.3@52500,53100 U2.4@52500,53000 52450,52950 51950,52950 ; U1.9@52500.3,51694.01 52561,51700 ; U1.9@52500.3,51705.99 52561,51700 ; U1.9@52502.1,51684.14 52561,51700 ; U1.9@52502.1,51715.86 52561,51700 ; U1.9@52505.54,51674.6 52561,51700 ; U1.9@52505.54,51725.4 52561,51700 ; U2.4@52508,52990.4 52451.29,52951.29 ; U2.4@52512.43,53001.36 52500,53057.5 ; U2.3@52512.43,53098.64 52500,53042.5 ; U2.3@52512.43,53101.36 52500,53157.5 ; U2.2@52512.43,53198.64 52500,53142.5 ; U2.4@52513.1,52981.71 52451.29,52951.29 ; U2.4@52522.07,53004.4 52500,53057.5 ; U2.3@52522.07,53095.6 52500,53042.5 ; U2.3@52522.07,53104.4 52500,53157.5 ; U2.2@52522.07,53195.6 52500,53142.5 ; v2@52830.29,52946.61 52850,52891 ; v2@52840.04,52949.15 52850,52891 ; v2(52850,52950) 52850,51725 52825,51700 U1.9@52500,51700 J1.9@52400,51700 52300,51700 52275,51675 52275,51575 52250,51550 51949.79,51550 ; v2@52859.96,52949.15 52850,52891 ; v2@52869.71,52946.61 52850,52891 ; Rp1.1@53000,52900 53275,52900 53300,52875 ; Rp1.1@53005,52900 53070,52900 ; Rp1.1@53005.77,52890.03 53070,52900 ; Rp1.1@53005.77,52909.97 53070,52900 ; Rp1.1@53008.08,52880.24 53070,52900 ; Rp1.1@53008.08,52919.76 53070,52900 ; Rp1.1@53011.92,52870.81 53070,52900 ; Rp1.1@53011.92,52929.19 53070,52900 ; U4.3@53285.4,52845.96 53300,52875 ; U4.3@53300,52825 53300,52875 ; U4.3@53300,52842.5 53300,52875 ; U4.3@53314.6,52845.96 53300,52875 ; 51950,52950 J6.5@51900.29,52900.5 51900.5,52900.5 51950,52950
pads on no net: J3.5 J3.6 J6.6 J6.7 J6.8 J10.5 J10.6 K5.3 K5.4 K5.5 K5.6 U3.9 U3.10 U3.11 U3.12 U3.13 U3.14 U3.15

## Keep-outs
KeepOutLayer:
  the board outline again, w2

## Other copper
TopLayer:
  rectangle net VCC: 52550,50550 53050,52550
  text "mada7" at 55475,52500 h40
  text "oooooooooo" at 52125,49750 h50
  text "1234567890" at 52125,49650 h50
  text "oooooooooo" at 52125,49580 h50

## Silkscreen, mask and mechanical layers (free items; w line width, h text height)
TopOverlay:
  text "USB-P" at 55175,52525 h40
  text "mada7" at 55475,52500 h40
  text "SCM-P" at 55050,52000 h40
  text "scm-txd" at 53425,51250 h40
  text "scm-rxd" at 53775,51250 h40
  text "2017-03-15" at 52125,49825 h40